# EAGLE board USB Host (EAGLE 6.5.0)
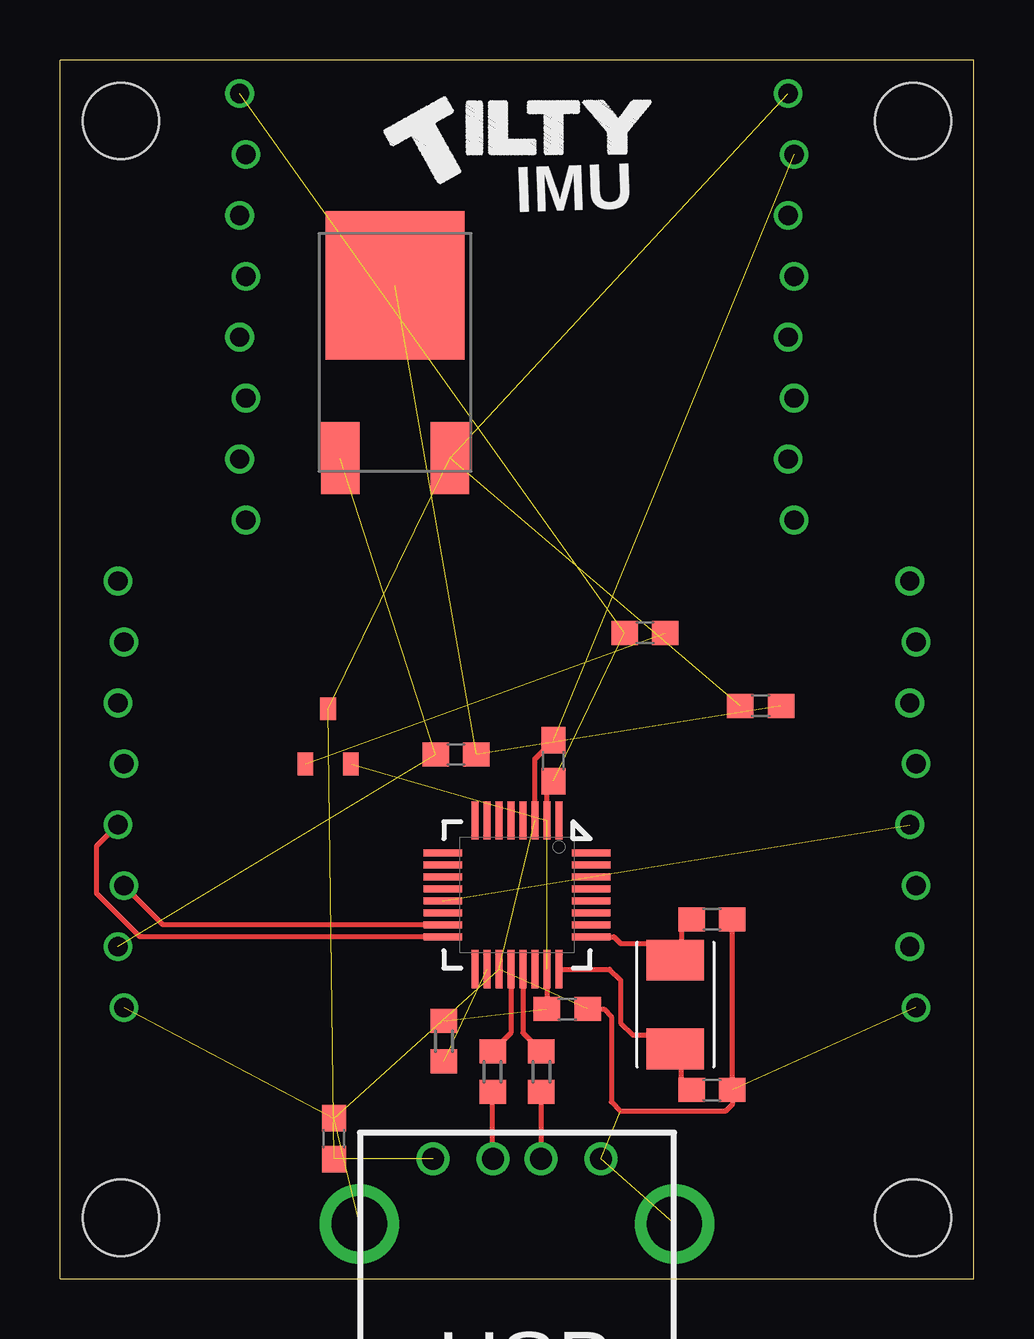
[diagram p0: board, top side]

Size 38.1 x 50.8 mm. Coordinates in mm from the lower left corner, seen from the top.
Outline: 0,0 38.1,0 38.1,50.8 0,50.8 0,0
Copper layers (1*16): Top 0.0356mm / dielectric 1.5011mm / Bottom 0.0356mm
Design rules "LaenPCBOrder": minimum track width 6mil, minimum drill 13mil, track to track 6mil, track to pad 6mil, pad to pad 6mil, via to via 6mil, smd to smd 6mil, copper to edge 15mil, drill to drill 6mil, minimum pad ring 7mil, minimum via ring 7mil, stop-mask expansion 4mil, vias tented up to drill 0mil, thermal gap 10mil
Holes 3.17 mm at 35.56,48.26 35.56,2.54 2.54,2.54 2.54,48.26

## Footprints (pad centres in the part's own frame; a part is rotated, then mirrored left to right if it is on the bottom)
C0603 = smd 1.1 x 1: 1 -0.85,0; 2 0.85,0
8-PIN_RECEPTACLE_LOCK_NO-SS = drill 0.8: P$1 -8.89,-0.127; P$2 -6.35,0.127; P$3 -3.81,-0.127; P$4 -1.27,0.127; P$5 1.27,-0.127; P$6 3.81,0.127; P$7 6.35,-0.127; P$8 8.89,0.127
R0603 = smd 1 x 1.1: 1 -0.85,0; 2 0.85,0
TQFP32_8MIL = smd 0.294 x 1.6: 1 -1.75,-3.1; 2 -1.25,-3.1; 3 -0.75,-3.1; 4 -0.25,-3.1; 5 0.25,-3.1; 6 0.75,-3.1; 7 1.25,-3.1; 8 1.75,-3.1; 17 1.75,3.1; 18 1.25,3.1; 19 0.75,3.1; 20 0.25,3.1; 21 -0.25,3.1; 22 -0.75,3.1; 23 -1.25,3.1; 24 -1.75,3.1 | smd 1.6 x 0.294: 9 3.1,-1.75; 10 3.1,-1.25; 11 3.1,-0.75; 12 3.1,-0.25; 13 3.1,0.25; 14 3.1,0.75; 15 3.1,1.25; 16 3.1,1.75; 25 -3.1,1.75; 26 -3.1,1.25; 27 -3.1,0.75; 28 -3.1,0.25; 29 -3.1,-0.25; 30 -3.1,-0.75; 31 -3.1,-1.25; 32 -3.1,-1.75
SOT23 = smd 0.65 x 0.95: P$1 -0.95,-1.15; P$2 0.95,-1.15; P$3 0,1.15
TO263 = smd 5.791 x 6.198: P$1 0,2.794 | smd 1.6 x 2.997: P$2 -2.286,-4.394; P$3 2.286,-4.394
USB_SOCKET = drill 0.92: P$1 -3.5,2.71; P$2 -1,2.71; P$3 1,2.71; P$4 3.5,2.71 | drill 2.3: P$5 -6.57,0; P$6 6.57,0
CRYSTAL-TXC-7A = smd 1.7 x 2.4: P$1 1.85,0; P$2 -1.85,0

## Placement (x,y rotation side)
C1  0.1uF  [C0603]  20.57,21.59 90 top
C2  0.1uF  [C0603]  21.15,11.24 0 top
C3  22pF  [C0603]  27.18,14.99 180 top
C4  22pF  [C0603]  27.18,7.87 180 top
C5  4.7uF  [C0603]  11.43,5.84 90 top
C6  1uF  [C0603]  24.38,26.92 0 top
C7  0.1uF  [C0603]  16.51,21.84 0 top
C8  4.7uF  [C0603]  29.21,23.88 0 top
JP1  8-PIN_HEADER  [8-PIN_RECEPTACLE_LOCK_NO-SS]  7.62,40.51 270 top
JP2  8-PIN_HEADER  [8-PIN_RECEPTACLE_LOCK_NO-SS]  2.54,20.19 270 top
JP3  8-PIN_HEADER  [8-PIN_RECEPTACLE_LOCK_NO-SS]  35.56,20.19 270 top
JP4  8-PIN_HEADER  [8-PIN_RECEPTACLE_LOCK_NO-SS]  30.48,40.51 270 top
R1  33  [R0603]  20.07,8.64 90 top
R2  33  [R0603]  18.03,8.64 90 top
R3  4.7K  [R0603]  16,9.91 90 top
U1  MAX3421E  [TQFP32_8MIL]  19.05,16 180 top
U2  AP7313SOT23R  [SOT23]  11.18,22.61 0 top
U3  LM2931  [TO263]  13.97,38.61 0 top
U$1  USB_SOCKETTYPE-A  [USB_SOCKET]  19.05,2.29 0 top
X1  [CRYSTAL-TXC-7A]  25.65,11.43 270 top

## Library data of the parts
C1-C8 R1-R3 = resistor
JP1-JP4 U2 = My Parts
U1 = CH_Maxim
U3 = on-semiconductor
U$1 = My Parts; PART#: USB-A1HSW6
X1 = SparkFun-FreqCtrl; PART#: 7A-12.000MAAE-T

## Nets
3V_SCL: JP4.P$7
3V_SDA: JP4.P$8
5V_SCL: JP3.P$2
5V_SDA: JP3.P$1
+3V3: C1.1 C2.1 C6.1 JP1.P$1 R3.2 U1.2 U1.23 U2.P$2
+5V: C5.1 C8.1 JP4.P$1 U2.P$3 U3.P$3 U$1.P$1
AUX_SCL: JP3.P$7
AUX_SDA: JP3.P$6
BATT_SENSE: JP3.P$4
BLUETOOTH_RX: JP1.P$2
BLUETOOTH_TX: JP1.P$3
BT_CMD: JP3.P$3
CS: U1.14
GI0: U1.26
GI1: U1.27
GI2: U1.28
GI3: U1.29
GI4: U1.30
GI5: U1.31
GI6: U1.32
GI7: U1.1
GND: C1.2 C2.2 C3.1 C4.1 C5.2 JP2.P$8 JP3.P$8 JP4.P$2 U1.3 U1.19 U$1.P$4 U$1.P$5 U$1.P$6
GO0: U1.4
GO1: U1.5
GO2: U1.6
GO3: U1.7
GO4: U1.8
GO5: U1.9
GO6: U1.10
GO7: U1.11
IMU_INT: JP1.P$7
INT: R3.1 U1.18
MEMORY_CS: JP1.P$8
MISO: JP2.P$6 U1.15
MOSI: JP2.P$5 U1.16
N$1: R2.2 U1.20
N$2: R1.2 U1.21
N$3: R2.1 U$1.P$2
N$4: JP2.P$4
N$5: JP2.P$3
N$6: JP2.P$2
N$7: JP2.P$1
N$8: R1.1 U$1.P$3
N$10: JP1.P$6
N$11: C4.2 U1.24 X1.P$1
N$12: C3.2 U1.25 X1.P$2
N$15: C6.2 U2.P$1
N$16: C7.2 C8.2 U3.P$1
N$26: JP4.P$5
N$27: JP4.P$6
RST: U1.12
SCK: JP3.P$5 U1.13
SERVO_1: JP1.P$4
SERVO_2: JP1.P$5
SERVO_3: JP4.P$4
SERVO_4: JP4.P$3
VCC: C7.1 JP2.P$7 U3.P$2

## Tracks (layer width: path | path; a pad name or v marks a point on that pad's centre or on a via)
+3V3  (5 unrouted)
  Top 0.203: U1.23 C2.1 | U1.2 20.3,20.47 C1.1
+5V  (5 unrouted)
GND  (9 unrouted)
  Top 0.203: C3.1 C4.1 28.03,7.26 27.75,6.99 23.37,6.99 22.99,7.37 22.99,10.92 22.67,11.24 C2.2 | U1.3 19.8,21.67 C1.2
INT  (1 unrouted)
MISO
  Top 0.203: U1.15 4.3,14.75 JP2.P$6
MOSI
  Top 0.203: U1.16 3.34,14.25 1.52,16.07 1.52,18.03 JP2.P$5
N$1
  Top 0.203: U1.20 18.8,10.25 R2.2
N$2
  Top 0.203: U1.21 19.3,10.25 R1.2
N$3
  Top 0.203: U$1.P$2 18.03,5 R2.1
N$8
  Top 0.203: U$1.P$3 20.07,5 R1.1
N$11
  Top 0.203: U1.24 22.91,12.9 23.37,12.45 23.37,10.67 23.88,10.16 25.07,10.16 X1.P$1 25.91,9.33 25.91,8.13 26.16,7.87 C4.2 26.42,7.87
N$12
  Top 0.203: U1.25 23.09,14.25 23.37,13.97 24.96,13.97 X1.P$2 25.91,13.53 25.91,14.73 26.16,14.99 C3.2
N$15  (1 unrouted)
N$16  (2 unrouted)
SCK  (1 unrouted)
VCC  (2 unrouted)

## Text on the board
tNames: IMU